# Altium PCB SmartTrialPcbfile.PcbDoc
Units mm, origin at the board's own origin, x right, y up, seen from the top; angles counter-clockwise.
Board outline 60 x 40 mm, 2 copper layers (Top Layer, Bottom Layer); 23 components, 14 nets, 58 pads, 10 vias.
Unrouted connection lines stored in the file: 2.
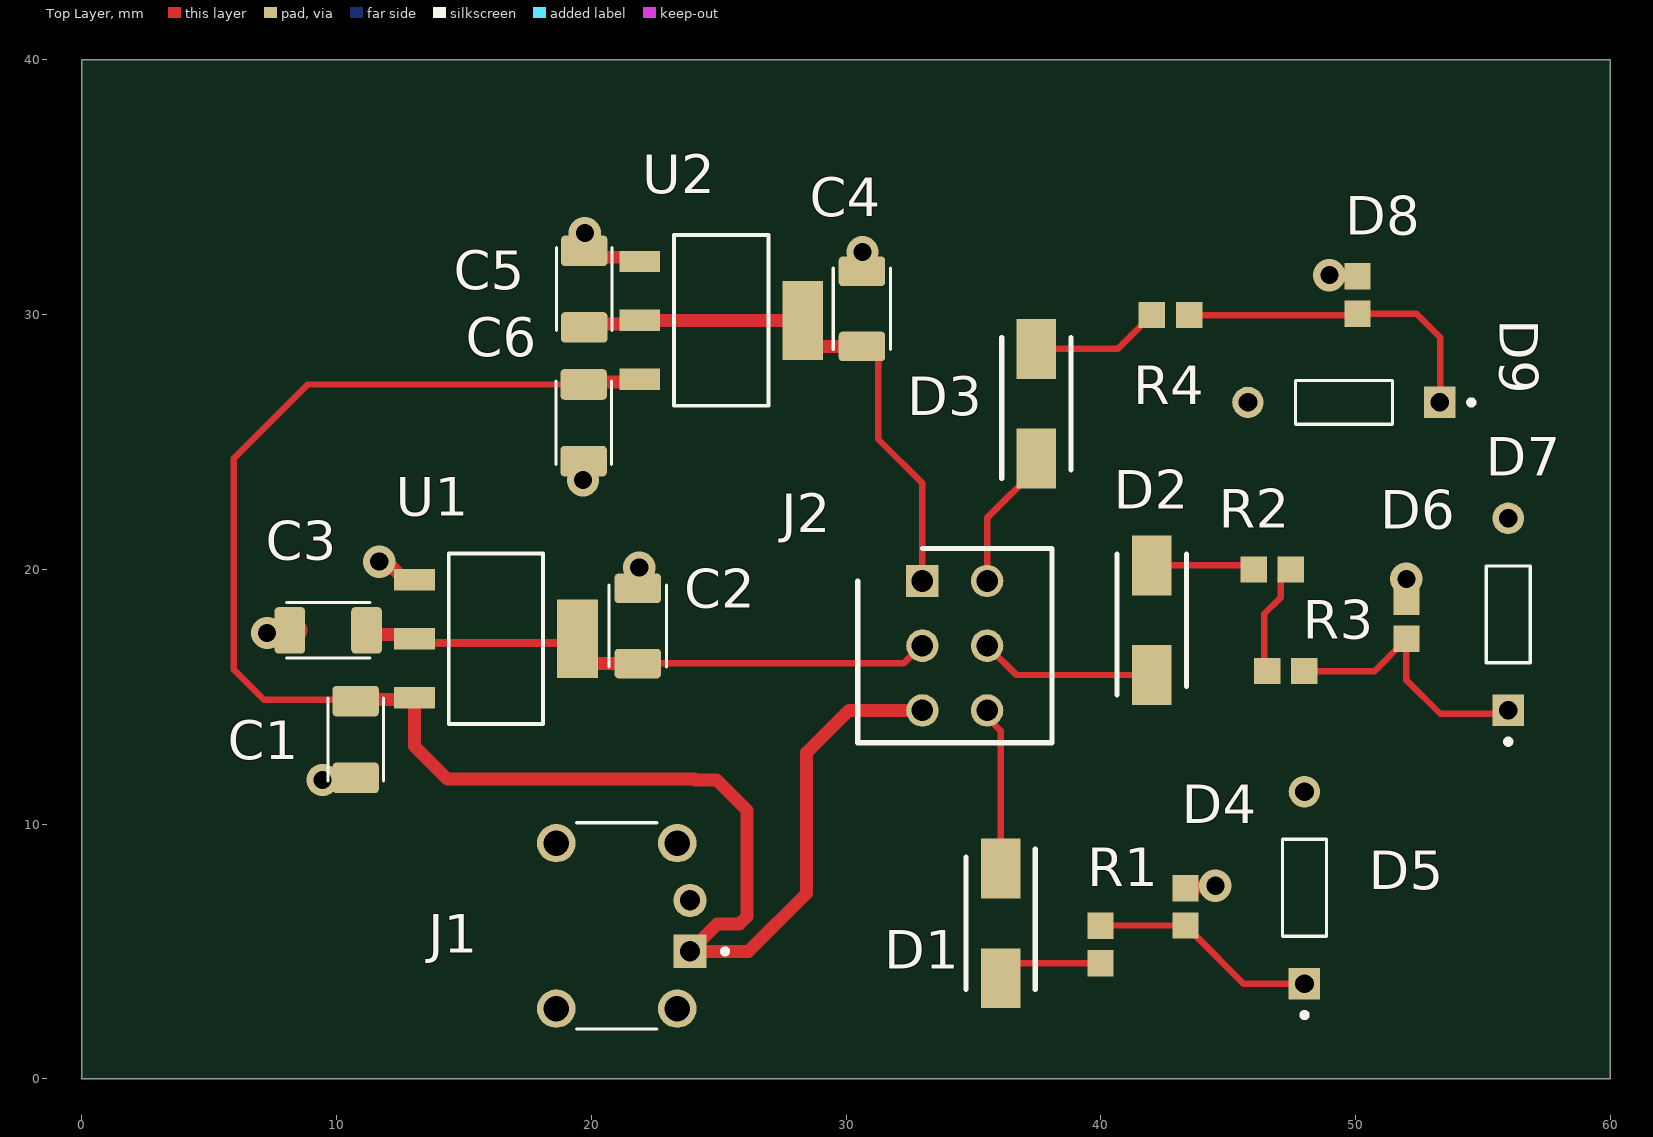
[diagram p0: Top Layer view]
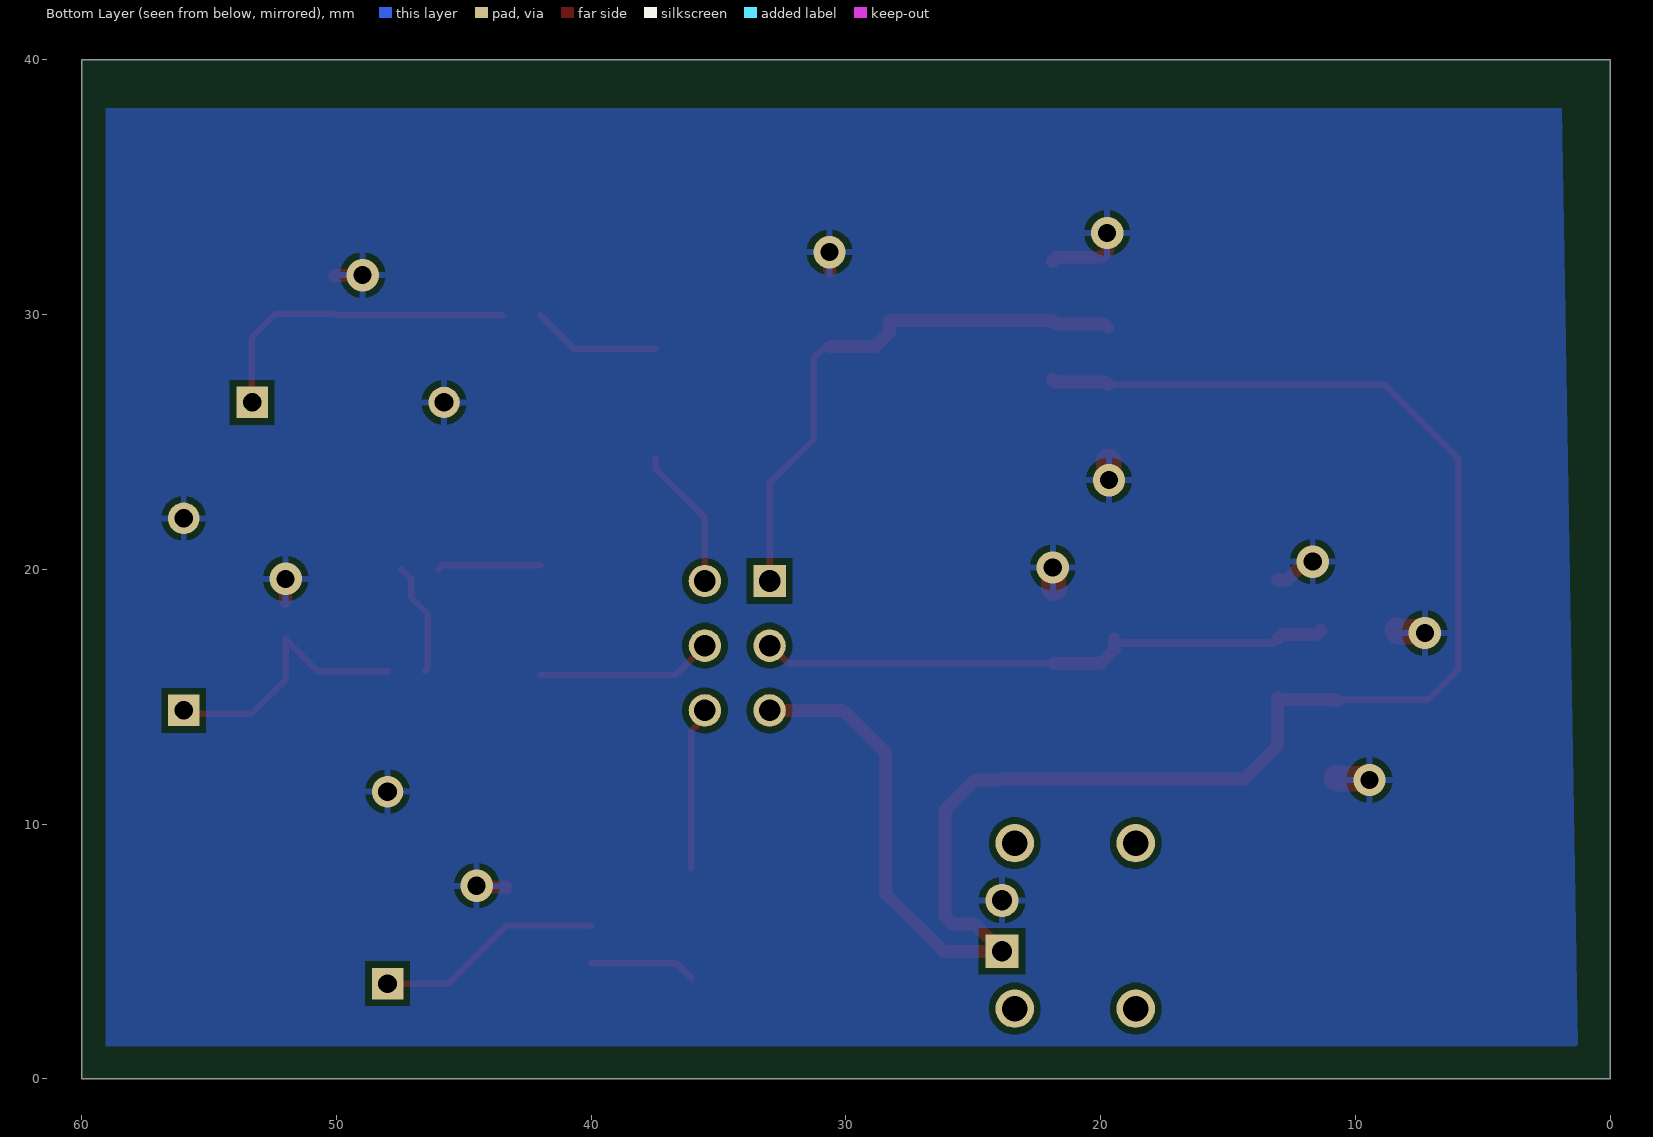
[diagram p1: Bottom Layer view, seen from below]
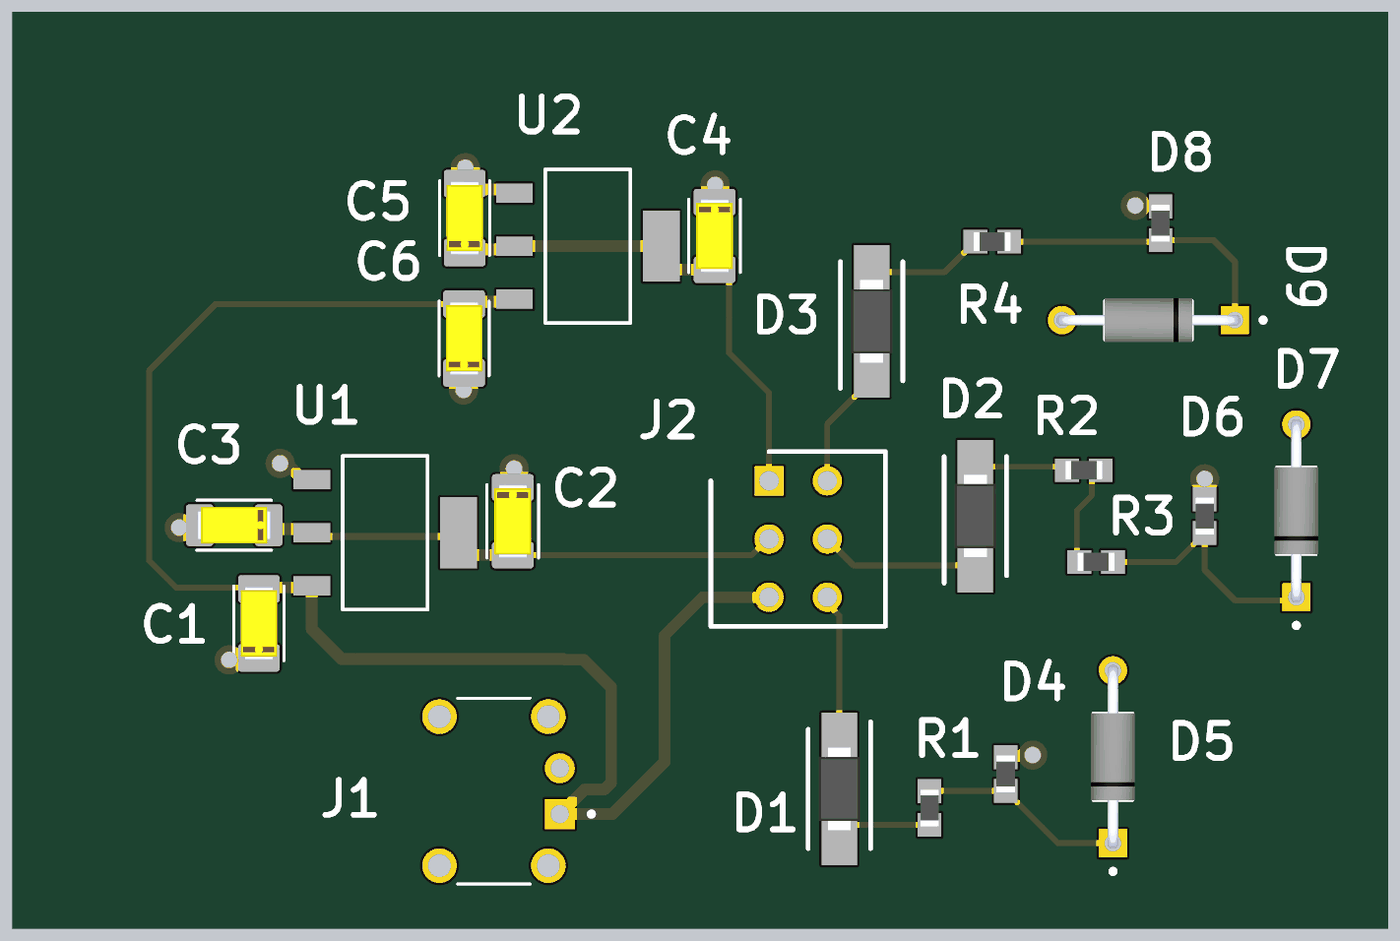
[diagram p2: 3D render of the assembled board from above, using the file's embedded part models]

## Layer stack, top to bottom
Top Solder: solder mask 0.0102, Solder Resist, Dk 3.5
Top Layer: signal copper 0.0356
Dielectric 1: dielectric 0.32, FR-4, Dk 4.8
Bottom Layer: signal copper 0.0356
Bottom Solder: solder mask 0.0102, Solder Resist, Dk 3.5

## Board outline
0,40 60,40 60,0 0,0

## Design rules (kind name [scope] priority, off if disabled: settings)
AssemblyTestPointUsage [All] p1: isadvanced=TRUE
AssemblyTestpoint [All] p1: isadvanced=TRUE testpointundercomponent=TRUE minsize=1.016 maxsize=2.54 preferedsize=1.524 minholesize=0 maxholesize=1.016 preferedholesize=0.813 testpointgrid=0.025 usegrid=TRUE gridtolerance=0 allowsidetop=TRUE allowsidebottom=TRUE
Clearance Clearance_1 [OnMid vs OnMid] p1: gap=0.254 ignorepadtopadclearanceinfootprint=FALSE sourcerule=37 cellrowname=All cellrowtype=0 cellcolname=All cellcoltype=0 innerlayers=TRUE
Clearance Clearance_2 [(ExistsOnLayer('Top Layer') Or ExistsOnLayer('Bottom Layer')) vs (ExistsOnLayer('Top Layer') Or ExistsOnLayer('Bottom Layer'))] p2: gap=0.254 ignorepadtopadclearanceinfootprint=FALSE sourcerule=37 cellrowname=All cellrowtype=0 cellcolname=All cellcoltype=0 outerlayers=TRUE
Clearance [All] p3: gap=0.254 ignorepadtopadclearanceinfootprint=FALSE ismatrix=TRUE
ComponentClearance [All] p1: isadvanced=TRUE gap=0.254 collisioncheckmode=3 verticalgap=0.254 showdistances=FALSE
FabricationTestPointUsage [All] p1: isadvanced=TRUE valid=0 allowmultiple=FALSE
FabricationTestpoint [All] p1: isadvanced=TRUE side=3 testpointundercomponent=TRUE minsize=1.016 maxsize=2.54 preferedsize=1.524 minholesize=0 maxholesize=1.016 preferedholesize=0.813 testpointgrid=0.025 allowsidetop=TRUE allowsidebottom=TRUE usegrid=TRUE gridtolerance=0
FanoutControl Fanout_BGA [IsBGA] p1: isadvanced=TRUE bgadir=Out bgaviamode=Centered fanoutstyle=Auto fanoutdirection=Alternating viagrid=0.025 // Fanout_BGA (Default Rule)
FanoutControl Fanout_LCC [IsLCC] p2: isadvanced=TRUE bgadir=Out bgaviamode=Centered fanoutstyle=Auto fanoutdirection=Alternating viagrid=0.025 // Fanout_LCC (Default Rule)
FanoutControl Fanout_SOIC [IsSOIC] p3: isadvanced=TRUE bgadir=Out bgaviamode=Centered fanoutstyle=Auto fanoutdirection=Alternating viagrid=0.025 // Fanout_SOIC (Default Rule)
FanoutControl Fanout_Small [(CompPinCount < 5)] p4: isadvanced=TRUE bgadir=Out bgaviamode=Centered fanoutstyle=Auto fanoutdirection=OutThenIn viagrid=0.025 // Fanout_Small (Default Rule)
FanoutControl Fanout_Default [All] p5: isadvanced=TRUE bgadir=Out bgaviamode=Centered fanoutstyle=Auto fanoutdirection=Alternating viagrid=0.025 // Fanout_Default (Default Rule)
Height [All] p1: isadvanced=TRUE minheight=0 maxheight=25.4 prefheight=12.7
HoleSize [All] p1: isadvanced=TRUE absolutevalues=TRUE maxlimit=2.54 minlimit=0.025 maxpercent=80.000 minpercent=20.000
HoleToHoleClearance [All] p1: isadvanced=TRUE gap=0.254 allowstackedmicrovias=TRUE
LayerPairs [All] p1: isadvanced=TRUE enforce=TRUE
MinimumSolderMaskSliver [All] p1: isadvanced=TRUE minsoldermaskwidth=0.15
NetAntennae [All] p1: isadvanced=TRUE netantennaetolerance=0
PasteMaskExpansion [All] p1: isadvanced=TRUE expansion=0
PlaneClearance [All] p1: isadvanced=TRUE clearance=0.508
PlaneConnect [All] p1: isadvanced=TRUE planeconnectstyle=Relief reliefexpansion=0.508 reliefentries=4 reliefconductorwidth=0.254 reliefairgap=0.254
PolygonConnect [All] p1: connectstyle=Relief reliefconductorwidth=0.254 reliefentries=4 polygonreliefangle="90 Angle" airgapwidth=0.254
RoutingCorners [All] p1: isadvanced=TRUE cornerstyle=45-Degree minsetback=2.54 maxsetback=2.54
RoutingPriority [All] p1: isadvanced=TRUE routingpriority=0
RoutingVias [All] p1: holewidth=0.711 width=1.27 viastyle="Through Hole" minholewidth=0.711 minwidth=1.27 maxholewidth=0.711 maxwidth=1.27
ShortCircuit [All] p1: isadvanced=TRUE allowed=FALSE
SilkToSilkClearance [All] p1: isadvanced=TRUE silktosilkclearance=0.254
SilkToSolderMaskClearance [IsPad] p1: isadvanced=TRUE minsilkscreentomaskgap=0.1 clearancetoexposedcopper=TRUE
SolderMaskExpansion [All] p1: isadvanced=TRUE expansion=0.102 istentingtop=FALSE
SupplyNets "Schematic Supply Nets" [InNet('GND')] p1: isadvanced=TRUE voltage=0.000
UnRoutedNet [All] p1: isadvanced=TRUE
UnpouredPolygon [All] p1: isadvanced=TRUE
Width [All] p1: maxlimit=4 minlimit=0.1 preferedwidth=0.254 minimp=50.000000 maximp=50.000000 favimp=50.000000
4 further rules are at their usual default settings.

## Components (designator, comment, footprint, x,y, rotation, side; value= is the part's Value field where it differs from the comment)
C1 "10uF" RESC3216X125N 10.75,13.32 r90 top
C2 "0.1uF" CAPC3216X110N 21.825,17.775 r270 top
C3 "10uF" RESC3216X125N 9.671,17.602 r180 top
C4 "0.1uF" CAPC3216X110N 30.625,30.225 r270 top
C5 "10uF" RESC3216X125N 19.725,31 r90 top
C6 "10uF" RESC3216X125N 19.7,25.75 r90 top
D1 "SS14" DIOM5227X270N 36.068,6.096 r270 top
D2 "SS14" DIOM5227X270N 42,18 r90 top
D3 "SS14" DIOM5227X270N 37.475,26.5 r90 top
D4 "Blue LED" RESC1607X60N 43.325,6.75 r270 top
D5 "1N4148" DIOAD753W49L380D172B 48,7.5 r90 top
D6 "Red LED" RESC1607X60N 52,18 r270 top
D7 "1N4148" DIOAD753W49L380D172B 56,18.232 r90 top
D8 "Green LED" RESC1607X60N 50.075,30.775 r270 top
D9 "1N4148" DIOAD753W49L380D172B 49.55,26.55 r180 top
J1 "1x2 Header" HARWIN_M80-8420242 21,6 r270 top
J2 "3x2 Header" SHDR6W65P254_2X3_762X762X1150P 33,19.54 r270 top
R1 "430R" RESC1607X60N 40,5.265 r90 top
R2 "20R" RESC1607X60N 46.735,20 r0 top
R3 "48R" RESC1607X60N 47.265,16 r0 top
R4 "150R" RESC1607X60N 42.735,29.975 r0 top
U1 "LM1117-5V" SOT230 16.256,17.272 r0 top
U2 "LM1117-3.3" SOT230 25.1,29.775 r0 top

## Footprints (in the part's own frame and the unit in brackets; to place one, negate y for a bottom-side part, rotate by r counter-clockwise, add the part's x,y. Pads: shape width x height; smd on the part's side, far side on the other; paste and mask are expansions set on the pad)
CAPC3216X110N [mm]
  rrect25% 1.16x1.82 smd: 1(-1.475,0) 2(1.475,0)
  silkscreen extent -1.6,-1.12 1.6,1.12, body extent -1.6,-0.8 1.6,0.8, height 1.8
DIOAD753W49L380D172B [mm]
  round 1.238 hole 0.73: A(3.768,0)
  rect 1.238x1.238 / inner round 1.238 / far side rect 1.238x1.238 hole 0.73: K(-3.768,0)
  silkscreen extent -5.1,-0.86 1.9,0.86, body extent -4,-0.95 4,0.95, height 1.91
DIOM5227X270N [mm]
  rect 2.35x1.55 smd: 1(-2.15,0) 2(2.15,0)
  silkscreen extent -2.93,-1.36 2.6,1.36, body extent -1.8,-0.9 1.8,0.9, height 1.43
HARWIN_M80-8420242 [mm]
  rect 1.308x1.308 / inner round 1.308 / far side rect 1.308x1.308 hole 0.8: 1(1,2.875)
  round 1.308 hole 0.8: 2(-1,2.875)
  round 1.508 hole 1: SH1(-3.25,2.375) SH2(3.25,2.375) SH3(-3.25,-2.375) SH4(3.25,-2.375)
  silkscreen extent -4.05,-1.58 4.05,4.35
RESC1607X60N [mm]
  rect 1.04x1.02 smd: 1(-0.735,0) 2(0.735,0)
  body extent -0.8,-0.4 0.8,0.4, height 0.55
RESC3216X125N [mm]
  rrect25% 1.2x1.82 smd: 1(-1.505,0) 2(1.505,0)
  silkscreen extent -1.63,-1.09 1.63,1.09, body extent -1.6,-0.8 1.6,0.8, height 1.8
SHDR6W65P254_2X3_762X762X1150P [mm]
  rect 1.275x1.275 / inner round 1.275 / far side rect 1.275x1.275 hole 0.85: 1(0,0)
  round 1.275 hole 0.85: 2(0,2.54) 3(2.54,0) 4(2.54,2.54) 5(5.08,0) 6(5.08,2.54)
  silkscreen extent -1.27,-2.54 6.35,5.08
SOT230 [mil]
  rect 63x33 smd: 1(-126,91) 2(-126,0) 3(-126,-91)
  rect 63x122 smd: 4(126,0)
  silkscreen extent -73,-132 73,132

## Part data
C1 C3 C5 C6: library part T491B106K016AT, "CAP TANT 10UF 10% 16V 1411", Case Code (Imperial)=1411, Case Code (Metric)=3528, Dielectric Material=Tantalum, ESR (Equivalent Series Resistance)=2.8R, Leakage Current=1.6uA, Max Operating Temperature=125°C, Min Operating Temperature=-55°C, Package Quantity=1, Ripple Current=174mA, Tolerance=10%, Voltage=16V, Capacitance=10uF, Case/Package=1411, Depth=2.8mm, Dissipation Factor=6%, Features="General Purpose", Height=1.9mm, Height - Seated (Max)=0.083inch, Lead Free="Lead Free", Lead Pitch=1.9mm, Length=3.5mm, Life (Hours)=2000Hour, Mount="Surface Mount", Number of Pins=2, Packaging="Tape and Reel", Polarity=Polar, REACH SVHC="No SVHC", RoHS Compliant=Yes, Termination=SMD/SMT, Voltage Rating=16V, Voltage Rating (DC)=16V, Width=0.11inch
C2 C4: library part T491A104K035AT, "CAP TANT 0.1UF 10% 35V 1206", Capacitance=100nF, Case Code (Imperial)=1206, Case Code (Metric)=3216, Dielectric Material=Tantalum, ESR (Equivalent Series Resistance)=20R, Leakage Current=500nA, Max Operating Temperature=125°C, Min Operating Temperature=-55°C, Package Quantity=1, Ripple Current=61mA, Tolerance=10%, Voltage=35V, Case/Package=1206, Construction=Flat, Depth=1.6mm, Dissipation Factor=4%, Features="General Purpose", Height=1.6mm, Height - Seated (Max)=0.071inch, Lead Free="Lead Free", Lead Pitch=1.2mm, Length=3.2mm, Life (Hours)=2000Hour, Mount="Surface Mount", Number of Pins=2, Packaging="Tape and Reel", Polarity=Polar, Radiation Hardening=No, REACH SVHC="No SVHC", RoHS Compliant=Yes, Series=T491, Size=1.6mm, Termination=SMD/SMT, Voltage Rating=35V, Voltage Rating (DC)=35V, Weight=0.000571oz, Width=1.6mm
D1 D2 D3: "DIODE SCHOTTKY 40V 1A SMA", Forward Current=1A, Manufacturer="ON Semiconductor", Max Junction Temp=+125°C, Max Repetitive Reverse Voltage=40V, Max Surge Forward Current=40A, Package=403AE, Peak Reverse Current=0.2mA, Temperature="-65°C to +125°C", Temperature Range Low=-65°C, Automotive=No, Category=Diode, ComponentLink2Description=Datasheet, ComponentLink2URL=https://www.onsemi.com/pub/Collateral/SS19-D.PDF, Device Class L1="Discrete Semiconductors", Device Class L2=Diodes, Device Class L3="Schottky Diodes", Digikey Description="DIODE SCHOTTKY 40V 1A SMA", Height=2.5mm, Lead Free=Yes, Manufacturer Part Number=SS14, Mouser Description="Schottky Diodes & Rectifiers SMA 40V 1.0A", Octopart=https://octopart.com/ss14-on+semiconductor-29205033, RoHS=TRUE, Standoff Height=0.05mm, Temperature Range High=+125°C
D4 D6 D8: library part LTT-C190KBKT, "LED BLUE CLEAR CHIP SMD", Case Code (Imperial)=0603, Case Code (Metric)=1608, Color=Red, Forward Current=30mA, Forward Voltage=2.4V, Lens Color=Colorless, Max Operating Temperature=85°C, Min Operating Temperature=-55°C, Package Quantity=1, Power Dissipation=75mW, Reverse Voltage=5V, Test Current=20mA, Case/Package=0603, Depth=0.8mm, Dominant Wavelength=631nm, Height=0.8mm, Illumination Color=Red, Lead Free="Lead Free", Length=1.6mm, Lens Style=Diffused, Lens Transparency=Clear, Luminous Intensity=54mcd, Mount="Surface Mount", Number of Elements=1, Number of LEDs=1, Number of Pins=2, Packaging="Tape and Reel", Power Rating=75mW, Radiation Hardening=No, Viewing Angle=130°, Wavelength=639nm, Width=0.8mm
D5 D7 D9: "DIODE GEN PURP 100V 200MA DO35", Average Rectified Current=200mA, Capacitance=4pF, Case/Package=DO-35, Current=4A, Forward Current=300mA, Forward Voltage=1V, Max Forward Surge Current (Ifsm)=1A, Max Operating Temperature=175°C, Max Power Dissipation=500mW, Max Repetitive Reverse Voltage (Vrrm)=100V, Max Reverse Current=5uA, Min Operating Temperature=-65°C, Package Quantity=2000, Contact Plating=Tin, Current Rating=200mA, Diameter=1.91mm, Element Configuration=Single, Height=4.56mm, Lead Free="Lead Free", Length=4.56mm, Max Reverse Voltage (DC)=100V, Max Surge Current=4A, Mount="Through Hole", Number of Pins=2, Output Current=200mA, Outside Diameter=1.85mm, Packaging=Bulk, Peak Non-Repetitive Surge Current=4A, Polarity=Standard, Power Dissipation=500mW, Radiation Hardening=No, REACH SVHC="No SVHC", Recovery Time=4ns, Reverse Recovery Time=4ns, Reverse Voltage=100V, Series=-, Voltage=100V, Voltage Rating (DC)=100V, Weight=0.01lb, Width=1.91mm
J1: library part 3bc925449376181038e59eaffc5286c, "CONN HEADER R/A 2POS 2MM", Case/Package=SIL, Color=Black, Contact Resistance=25mR, Current Rating=3A, Insulation Resistance=100MR, Max Operating Temperature=125°C, Max Voltage Rating (AC)=120V, Min Operating Temperature=-55°C, Package Quantity=32, Connector Type=Plug, Contact Gender=Male, Contact Material=Bronze, Contact Plating=Gold, Contact Type="Male Pin", Fastening Type=Latch, Gender=Male, Housing Color=Black, Housing Material=Polyamide, Length=7.6mm, Max Current Rating=3A, Mount="Through Hole", Number of Contacts=2, Number of Positions=2, Number of Rows=1, Orientation="Right Angle", Packaging=Rail/Tube, Pitch=2mm, Radiation Hardening=No, REACH SVHC="No SVHC", RoHS Compliant=Yes, Series="Datamate L-Tek", Termination=Solder, Voltage Rating=120V
J2: library part 281739-3, "3X2 connector", Package=None, Availability=Unavailable, Component Type=Standard, Design Item ID=281739-3, MP=281739-3, Pin Count=6, Price=None, Source=281739-3.SchLib
R1: library part "RES 430 Ohm", "430 Ohm SMD 0603 Resistor", Manufacturer=Panasonic, Part Number=ERJ-3GEYJ431V
R2: library part "RES 20  Ohm", "20 ohm resistor SMD 0603", Manufacturer=YAGEO, Part Number=RC0603FR-1020RL
R3: library part "RES  48 Ohms", "Resistor 48 Ohms SMD 0603", Manufacturer=Panasonic, Part Number=ERJ-L03UJ48MV
R4: library part "RES 150 Ohm_1", "150 ohm resistor SMD 0603", Manufacturer=Panasonic, Part Number=ERA3AEB151V
U1 U2: library part LM1117-3.3_1, "SOT-223 LM1117-3.3", Package="SOT-223-4 Texas Instruments", Availability=Unavailable, Component Type=Standard, Design Item ID=LM1117-3.3, MF="Texas Instruments", MP=LM1117-3.3, Pin Count=4, Price=None, SnapEDA_Link=https://www.snapeda.com/parts/LM1117-3.3/Texas%20Instruments/view-part/549181/?ref=snap, Source=SnapEDAsch.SchLib

## Via types
v1: diameter 1.27, hole 0.711, Top Layer to Bottom Layer, tented both sides, 10 vias

## Nets (pads, with @x,y where several pads share a name; then routed paths per layer and width w, separated by ;. In a path a pad name is that pad's centre, name@x,y a point inside that pad or via, vN(x,y) a via of type N, cw(c..) or ccw(c..) an arc to the next point about the centre after c; other vN are vias at no path point)
GND: C1.1 C2.1 C3.2 C4.1 C5.2 C6.1 D4.1 D5.A D6.1 D7.A D8.1 D9.A J1.2 U1.1 U2.1 | length 12.9
  Top Layer w0.508: v1(11.675,20.3) 11.821,20.154 12.104,20.154 12.675,19.583 U1.1 ; v1(19.75,33.2) 19.725,33.175 C5.2 19.979,32.251 21.734,32.251 U2.1 ; C4.1 30.65,31.725 v1(30.65,32.45) ; D4.1 43.37,7.53 44.455,7.53 v1(44.5,7.575) ; v1(48.975,31.55) 48.995,31.53 50.055,31.53 D8.1 ; D6.1 v1(52,19.625) ; D7.A D7.A@56.074,22.074
  Top Layer w1: v1(7.275,17.5) 7.325,17.55 8.315,17.55 C3.2@8.365,17.6 ; v1(9.45,11.725) 9.495,11.77 10.705,11.77 C1.1 ; v1(19.675,23.5) 19.688,23.513 19.688,24.232 C6.1 ; C2.1 21.853,19.278 21.853,20.042 v1(21.881,20.07)
NetC1_2: C1.2 C6.2 J1.1 J2.5 U1.3 U2.3 | length 72.4
  Top Layer w0.254: C1.2 10.691,14.884 7.137,14.884 5.969,16.053 5.969,24.359 8.865,27.255 C6.2
  Top Layer w0.508: C1.2 10.818,14.893 12.988,14.893 U1.3 13.056,13.056 14.351,11.76 24.054,11.76 24.079,11.735 24.917,11.735 26.111,10.541 26.111,6.368 25.814,6.071 24.946,6.071 J1.1 26.175,5 28.45,7.275 28.45,12.8 30.11,14.46 J2.5 ; C6.2 19.804,27.359 21.795,27.359 U2.3
NetC2_2: C2.2 C3.1 J2.3 U1.2 U1.4 | length 22.8
  Top Layer w0.254: C2.2@21.844,16.305 32.255,16.305 32.95,17 J2.3
  Top Layer w0.305: U1.2 13.22,17.108 19.292,17.108 U1.4
  Top Layer w0.508: C3.1@11.375,17.6 11.539,17.436 12.892,17.436 U1.2 ; U1.4 19.456,16.851 20.002,16.305 C2.2@21.844,16.305
NetC4_2: C4.2 C5.1 J2.1 U2.2 U2.4 | length 22
  Top Layer w0.254: C4.2 30.811,28.75 31.263,28.298 31.263,25.11 33,23.373 J2.1
  Top Layer w0.508: C5.1 19.865,29.635 21.76,29.635 U2.2 U2.4 28.3,29.296 28.846,28.75 C4.2
NetD1_1: D1.1 J2.6 | length 6.4
  Top Layer w0.254: J2.6 35.54,14.184 36.068,13.656 D1.1
NetD1_2: D1.2 R1.1 | length 4.2
  Top Layer w0.254: D1.2 36.652,4.53 R1.1
NetD2_1: D2.1 J2.4 | length 6.9
  Top Layer w0.254: J2.4 36.69,15.85 D2.1
NetD2_2: D2.2 R2.1 | length 4.1
  Top Layer w0.254: D2.2 45.85,20.15 R2.1
NetD3_1: D3.1 J2.2 | length 5.6
  Top Layer w0.254: J2.2 35.54,22.015 37.475,23.95 D3.1
NetD3_2: D3.2 R4.1 | length 5.1
  Top Layer w0.254: D3.2 40.665,28.65 41.99,29.975 R4.1
NetD4_2: D4.2 D5.K R1.2 | length 9
  Top Layer w0.254: R1.2 40.015,6.015 D4.2 43.325,6.005 43.708,5.622 43.718,5.622 45.608,3.732 D5.K
NetD6_2: D6.2 D7.K R3.2 | length 10.8
  Top Layer w0.254: R3.2 50.745,16 52,17.255 D6.2 52,15.65 53.325,14.325 55.862,14.325 D7.K
NetD8_2: D8.2 D9.K R4.2 | length 12.8
  Top Layer w0.254: R4.2 50.01,29.975 D8.2 52.385,30.04 53.325,29.1 53.325,26.557 D9.K
NetR2_2: R2.2 R3.1 | length 4.5
  Top Layer w0.254: R3.1 46.425,16.105 46.425,18.25 47.077,18.902 47.077,19.617 47.46,20 R2.2
pads on no net: J1.SH1 J1.SH2 J1.SH3 J1.SH4

## Polygon pours and split planes (outlines as drawn)
GND on Bottom Layer "GND_L02_P001" (solid, pour order 1): 1.905,38.1 59.055,38.1 59.055,1.27 1.27,1.27

## Silkscreen, mask and mechanical layers (free items; w line width, h text height)
Board outline:
  lines w0.2: 0,0 59.995,0 60.046,0.051 60.046,39.98 60.02,40.005 0,40.005 0,0